# Altium PCB IP2366_DEMO_V1.41.pcbdoc
Units mil, origin at the board's own origin, x right, y up, seen from the top; angles counter-clockwise.
Board outline 4240 x 2935 mil, 2 copper layers (Top Layer, Bottom Layer); 72 components, 54 nets, 245 pads, 677 vias.
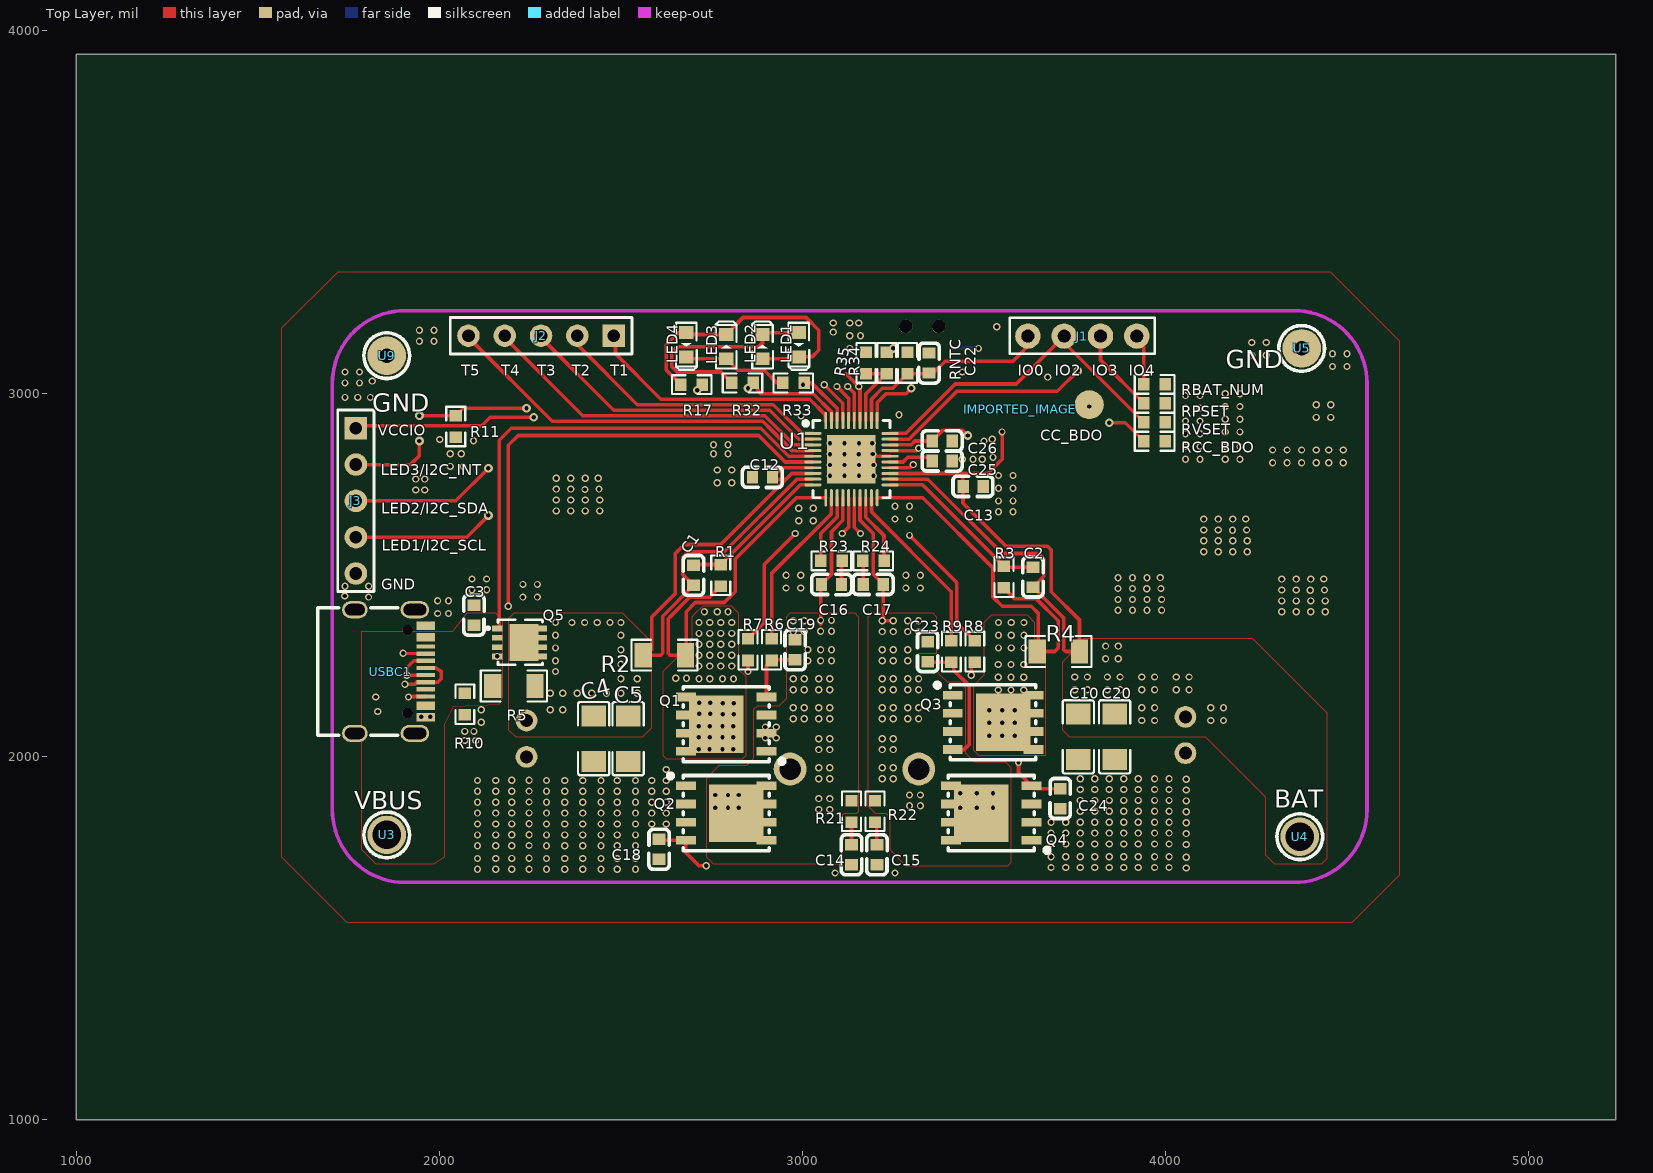
[diagram p0: Top Layer view]
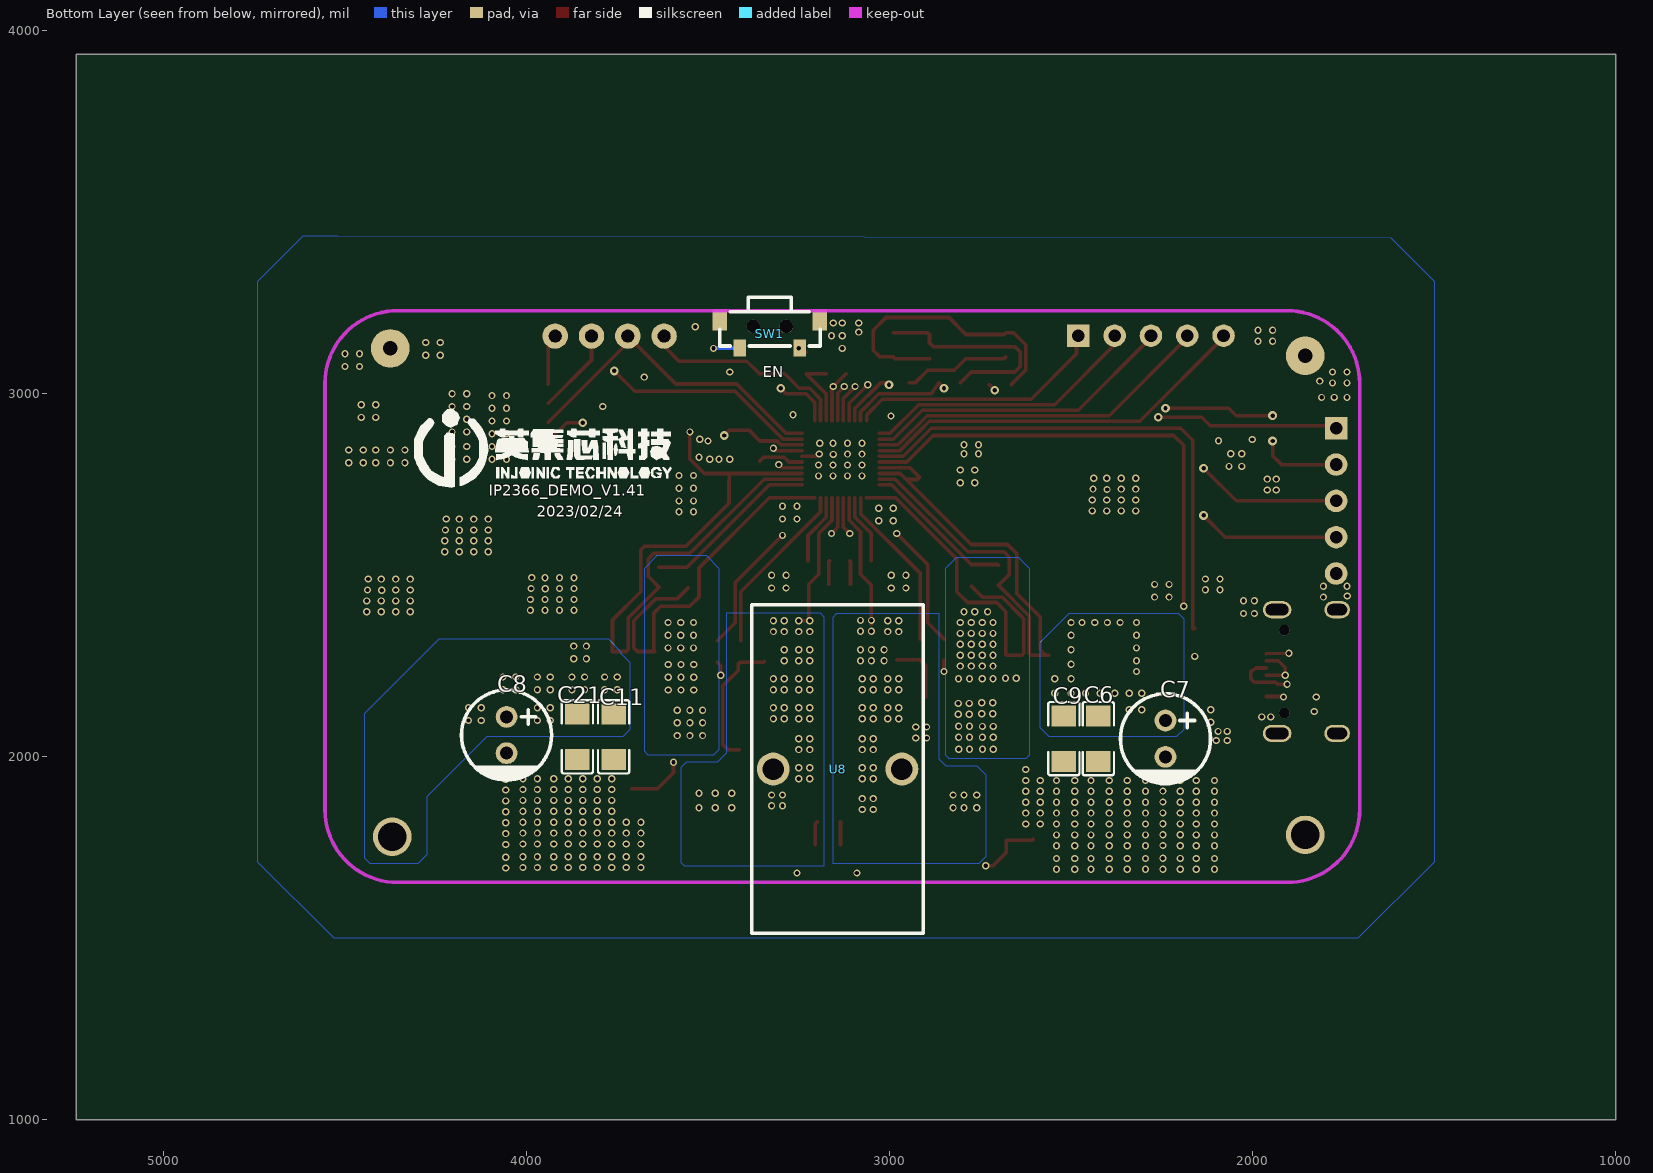
[diagram p1: Bottom Layer view, seen from below]

## Layer stack, top to bottom
Top Layer: signal copper (thickness not stored)
Dielectric: dielectric 12.6, FR-4, Dk 4.8
Bottom Layer: signal copper (thickness not stored)

## Board outline
5240,1000 1000,1000 1000,3935 5240,3935

## Components (designator, comment, footprint, x,y, rotation, side; value= is the part's Value field where it differs from the comment)
C1 "470nF" C0603 2700,2500 r90 top
C2 "1uF" C0603 3635,2495 r270 top
C3 "0.1u" C0603 2095,2390 r270 top
C4 "22uF/35V" C1206#1 2425,2050 r270 top
C5 "22uF/35V" C1206#1 2520,2050 r270 top
C6 "NC" C1206#2 2425,2050 r90 bottom
C7 "220uF/35V" CAP-D6.3-F2.5 2240,2050 r90 bottom
C8 "220uF/35V" CAP-D6.3-F2.5 4055,2060 r90 bottom
C9 "NC" C1206#2 2520,2050 r90 bottom
C10 "22uF/35V" C1206#1 3760,2055 r270 top
C11 "22uF/35V" C1206#2 3760,2055 r90 bottom
C12 "2.2uF" C0603 2890,2770 r0 top
C13 "2.2uF" C0603 3470,2745 r0 top
C14 "3.3nF" C0603 3135,1730 r270 top
C15 "3.3nF" C0603 3205,1730 r270 top
C16 "0.1uF" C0603 3080,2475 r180 top
C17 "0.1uF" C0603 3195,2475 r0 top
C18 "NC" C0603 2605,1745 r270 top
C19 "NC" C0603 2980,2295 r90 top
C20 "22uF/35V" C1206#1 3860,2055 r270 top
C21 "NC" C1206#2 3860,2055 r90 bottom
C22 "0.1uF" C0603 3349,3084.81 r90 top
C23 "NC" C0603 3345,2290 r90 top
C24 "NC" C0603 3710,1885 r270 top
C25 "2.2uF" C0603 3385,2815 r0 top
C26 "2.2uF" C0603 3385,2870 r0 top
IMPORTED_IMAGE "IMPORTED_IMAGE" IMPORTED_IMAGE 3600.02,2957.27 r0 top
J1 "Header4" HEADER4 3770,3160 r0 top
J2 "HDR-M-2.54_1x5" HDR-M-2.54_1X5 2280,3160 r180 top
J3 "HDR-M-2.54_1x5" HDR-M-2.54_1X5 1770,2705 r270 top
LED1 "LED-0603_B" LED0603_BLUE 2990,3135 r270 top
LED2 "LED-0603_B" LED0603_BLUE 2890,3130 r90 top
LED3 "LED-0603_B" LED0603_BLUE 2790,3130 r90 top
LED4 "LED-0603_B" LED0603_BLUE 2680,3135 r270 top
Q1 "AER4061BE" DFN-8_L5.2-W5.6-P1.27-LS6.1-BL 2790,2090 r90 top
Q2 "AER4061BE" DFN-8_L5.2-W5.6-P1.27-LS6.1-BL 2790,1845 r270 top
Q3 "AER4061BE" DFN-8_L5.2-W5.6-P1.27-LS6.1-BL 3525,2095 r270 top
Q4 "AER4061BE" DFN-8_L5.2-W5.6-P1.27-LS6.1-BL 3520,1845 r90 top
Q5 "RU3030M2" PDFN3333-8_L3.1-W3.2-P0.65-LS3.4-BL 2220,2315 r270 top
R1 "51R" R0603 2775,2500 r90 top
R2 "0.005R" R1206 2620,2280 r0 top
R3 "10R" R0603 3555,2495 r90 top
R4 "0.005R" R1206 3705,2290 r0 top
R5 "0R" R1206 2205,2195 r0 top
R6 "2R" R0603 2915,2295 r90 top
R7 "10R" R0603 2850,2295 r90 top
R8 "2R" R0603 3475,2290 r90 top
R9 "2R" R0603 3410,2290 r90 top
R10 "10K" R0603 2070,2145 r270 top
R11 "NC" R0603 2045,2910 r270 top
R17 "100R" R0603 2695,3025 r0 top
R21 "2R" R0603 3135,1850 r90 top
R22 "2R" R0603 3200,1850 r90 top
R23 "0R" R0603 3079.8,2540 r0 top
R24 "0R" R0603 3195.2,2540 r0 top
R32 "100R" R0603 2835,3030 r180 top
R33 "100R" R0603 2975,3030 r180 top
R34 "43K" R0603 3232.28,3085 r90 top
R35 "10K" R0603 3175,3085 r90 top
RBAT_NUM "18K" R0603 3970,3026 r180 top
RCC_BDO "NC" R0603 3970,2869 r180 top
RNTC "10K@25℃" R0603 3289.56,3085 r270 top
RPSET "27K" R0603 3970,2973.67 r180 top
RVSET "27K" R0603 3970,2921.33 r180 top
SW1 "1TS002G-1900-3500-CT" KEY-SMD_1TS002G 3330,3165 r180 bottom
U1 "IP2366" QFN-40_L5.0-W5.0-P0.40-TL-EP3.4 3135,2820 r0 top
U3 "GND" TESTPOINT-TH_BD3.2#1 1855,1785 r0 top
U4 "BAT" TESTPOINT-TH_BD3.2#1 4370,1780 r180 top
U5 "GND" TESTPOINT-TH_BD3.2#2 4375,3125 r0 top
U8 "22uH" IND-TH_L23.0-W12.0-P9.00-D1.3 3143.2,1966.39 r270 bottom
U9 "GND" TESTPOINT-TH_BD3.2#2 1855,3105 r0 top
USBC1 "TYPE-C-31-M-12" USB-C_SMD-TYPE-C-31-M-12 1865,2235 r270 top

## Footprints (in the part's own frame and the unit in brackets; to place one, negate y for a bottom-side part, rotate by r counter-clockwise, add the part's x,y. Pads: shape width x height; smd on the part's side, far side on the other; paste and mask are expansions set on the pad)
C0603 [mm]
  rect 0.8x0.9 smd: 1(-0.7,0) 2(0.7,0)
  silkscreen extent -1.41,-0.71 1.39,0.72
C1206#1 [mm]
  rect 1.485x1.728 smd: 1(-1.593,0) 2(1.593,0)
  silkscreen extent -2.56,-1.09 2.56,1.09
C1206#2 [mm]
  rect 1.485x1.728 smd: 1(1.593,0) 2(-1.593,0)
  silkscreen extent -2.56,-1.09 2.56,1.09
CAP-D6.3-F2.5 [mil]
  round 60 hole 36: 1(50,0) 2(-50,0)
  silkscreen extent -125,-124 124,124
DFN-8_L5.2-W5.6-P1.27-LS6.1-BL [mil]
  rect 24x55 smd: 1(-75,-111) 2(-25,-111) 3(25,-111) 4(75,-111) 5(75,111) 6(25,111) 7(-25,111) 8(-75,111)
  rect 157.99x150 smd: 9(0,28)
  silkscreen extent -107,-158 104,118
HDR-M-2.54_1X5 [mil]
  rect 62x62 hole 35: 1(-200,0)
  round 62 hole 35: 2(-100,0) 3(0,0) 4(100,0) 5(200,0)
  silkscreen extent -250,-50 250,50
HEADER4 [mil]
  round 70 hole 35 slot 35.2 at 0 deg: 1(-149,-1) 2(-49,-1) 3(51,-1) 4(151,-1)
  silkscreen extent -199,-50 201,50
IMPORTED_IMAGE [mil]
IND-TH_L23.0-W12.0-P9.00-D1.3 [mm]
  round 2.3 hole 1.5: 1(0,4.5) 2(0,-4.5)
  silkscreen extent -11.5,-6 11.5,6
KEY-SMD_1TS002G [mm]
  rect 0.9x1.2 smd: 1(2.1,-0.975) 2(-2.1,-0.975)
  rect 1x1.45 smd: 3(-3.5,0.975) 4(3.5,0.975)
  round 0.95 hole 0.95 unplated: ""(-1.15,0.525) ""(1.15,0.525)
  silkscreen extent -3.5,-0.85 3.52,2.56
LED0603_BLUE [mm]
  rect 0.9x1 smd: 1(-0.85,0) 2(0.85,0)
  silkscreen extent -1.54,-0.73 1.75,0.73
PDFN3333-8_L3.1-W3.2-P0.65-LS3.4-BL [mm]
  rect 0.4x0.75 smd: 1(-0.975,-1.533) 2(-0.325,-1.533) 3(0.325,-1.533) 4(0.975,-1.533)
  rect 0.4x0.8 smd: 5(0.975,1.533) 6(0.325,1.533) 7(-0.325,1.533) 8(-0.975,1.533)
  rect 2.6x2 smd: 9(-0.005,0.333)
  silkscreen extent -1.59,-2.29 1.56,1.61
QFN-40_L5.0-W5.0-P0.40-TL-EP3.4 [mm]
  oval 1.2x0.2 smd: 1(-2.699,1.8) 2(-2.699,1.4) 3(-2.699,1) 4(-2.699,0.6) 5(-2.699,0.2) 6(-2.699,-0.2) 7(-2.699,-0.6) 8(-2.699,-1) 9(-2.699,-1.4) 10(-2.699,-1.8) 21(2.699,-1.8) 22(2.699,-1.4) 23(2.699,-1) 24(2.699,-0.6) 25(2.699,-0.2) 26(2.699,0.2) 27(2.699,0.6) 28(2.699,1) 29(2.699,1.4) 30(2.699,1.8)
  oval 0.2x1.2 smd: 11(-1.8,-2.699) 12(-1.4,-2.699) 13(-1,-2.699) 14(-0.6,-2.699) 15(-0.2,-2.699) 16(0.2,-2.699) 17(0.6,-2.699) 18(1,-2.699) 19(1.4,-2.699) 20(1.8,-2.699) 31(1.8,2.699) 32(1.4,2.699) 33(1,2.699) 34(0.6,2.699) 35(0.2,2.699) 36(-0.2,2.699) 37(-0.6,2.699) 38(-1,2.699) 39(-1.4,2.699) 40(-1.8,2.699)
  rect 3.4x3.4 smd: 41(0,0)
  silkscreen extent -3.35,-2.7 2.7,2.7
R0603 [mil]
  rect 31.75x34.02 smd: 1(-29.66,0) 2(29.66,0)
  silkscreen extent -55,-26 55,26
R1206 [mil]
  rect 47.54x66.97 smd: 1(-58.22,0) 2(58.22,0)
  silkscreen extent -91,-42 91,42
TESTPOINT-TH_BD3.2#1 [mm]
  round 2.7 hole 2: 1(0,0)
  silkscreen extent -1.6,-1.6 1.6,1.6
TESTPOINT-TH_BD3.2#2 [mm]
  round 2.7 hole 1.016: 1(0,0)
  silkscreen extent -1.6,-1.6 1.6,1.6
USB-C_SMD-TYPE-C-31-M-12 [mm]
  oval 1.2x2 hole 0.8 slot 1.6 at 90 deg: 0(-4.325,1.716) 1(4.325,1.716)
  oval 1.2x1.8 hole 0.8 slot 1.4 at 90 deg: 2(4.325,-2.484) 3(-4.325,-2.484)
  rect 0.3x1.3 smd: A1(-3.35,2.484) A4(-2.55,2.484) A5(-1.25,2.484) A6(-0.25,2.484) A7(0.25,2.484) A8(1.25,2.484) A9(2.55,2.484) A12(3.35,2.484) B1(3.05,2.484) B4(2.25,2.484) B5(1.75,2.484) B6(0.75,2.484) B7(-0.75,2.484) B8(-1.75,2.484) B9(-2.25,2.484) B12(-3.05,2.484)
  round 0.75 hole 0.75 unplated: ""(-2.9,1.216) ""(2.9,1.216)
  silkscreen extent -4.47,-5.08 4.47,0.5

## Free pads (board coordinates)
  round 80 smd: 2(3790,2970)

## Via types
v1: diameter 20, hole 12, Top Layer to Bottom Layer, tented both sides, 663 vias
v2: diameter 24, hole 12, Top Layer to Bottom Layer, tented both sides, 14 vias

## Nets (pads, with @x,y where several pads share a name; then routed paths per layer and width w, separated by ;. In a path a pad name is that pad's centre, name@x,y a point inside that pad or via, vN(x,y) a via of type N, cw(c..) or ccw(c..) an arc to the next point about the centre after c; other vN are vias at no path point)
BAT: C2.2 C8.1 C10.1 C11.1 C13.1 C20.1 C21.1 R4.2 SW1.2 U1.22 U1.23 U4.1 | length 2301.7
  Top Layer w10: U1.22 3345.12,2764.88 3550,2560 3650,2560 3665,2545 3665,2497.44 C2.2 ; U1.23 3510.63,2780.63 3545,2815 ; 3441.9,2780.6 C13.1 ; C13.1 3442.44,2698.5 3560.94,2580 3675,2580 3685,2570 3685,2455 3763.22,2376.78 R4.2 3725,2290 3720,2295 3720,2382.4 C2.2 ; 3528.2,2798.2 3550,2820 v1(3550,2895)
  Mid-Layer 1 w10: v1(3485,3125) 3550,3060 v1(3550,2895)
  Bottom Layer w10: SW1.2 3414.28,3125 v1(3485,3125)
  other v1: 3935,2100 3970,2100 4125,2100 4160,2100 3935,2135 3970,2135 4125,2135 4160,2135 3750,2185 3785,2185 3840,2185 3875,2185 3935,2185 3970,2185 4030,2185 4065,2185 3750,2220 3785,2220 3840,2220 3875,2220 3935,2220 3970,2220 4030,2220 4065,2220 3835,2270 3870,2270 3835,2305 3870,2305
BAT_NUM: J1.4 RBAT_NUM.2 U1.27 | length 951.4
  Top Layer w10: U1.27 3313.6,2843.6 v1(3320,2850) ; J1.4 3940.34,3139.66 RBAT_NUM.2
  Mid-Layer 1 w10: v1(3320,2850) 3612,2850 J1.4
CC1: U1.37 USBC1.A5 | length 2079.8
  Top Layer w10: v1(1900,2285) USBC1.A5 ; v1(3060,3025) 3111.4,2973.6 U1.37
  Mid-Layer 1 w10: v1(1900,2285) 1880,2305 1880,2915 2030,3065 3020,3065 v1(3060,3025)
CC2: U1.34 USBC1.B5 | length 2462.6
  Top Layer w10: v1(1915,2165) 1916.1,2166.1 USBC1.B5 ; 3120,3055.3 3155,3020.3 v1(3155,3020) 3158.62,3016.38 U1.34
  Mid-Layer 1 w10: v1(1915,2165) 1885,2165 1835,2215 1835,2960 1990,3115 3060,3115 v1(3155,3020)
CC_BDO: pad.2 RCC_BDO.2 U1.24 | length 931.3
  Top Layer w10: U1.24@3241.3,2796 3296,2796 v1(3305,2805) ; v2(3845,2920) 3889.34,2920 RCC_BDO.2
  Mid-Layer 1 w10: v1(3305,2805) 3305,2800 3820,2800 3845,2825 3845,2960 3840,2965 v1(3790,2965)
DM: U1.36 USBC1.A7 USBC1.B7 | length 2293.1
  Top Layer w10: USBC1.A7 v1(1910,2225) 1910,2245 1929.53,2264.53 USBC1.B7 ; v1(3095,3020) 3127.13,2987.87 U1.36
  Mid-Layer 1 w10: v1(1910,2225) 1895,2225 1865,2255 1865,2935 2010,3080 3035,3080 v1(3095,3020)
DP: U1.35 USBC1.A6 USBC1.B6 | length 2430.8
  Top Layer w10: v1(1905,2200) 1931.5,2200 1937,2205.5 USBC1.B6 1995.5,2205.5 2005,2215 2005,2235 1990.2,2244.8 USBC1.A6 ; v1(3125,3020) 3142.9,3002.1 U1.35
  Mid-Layer 1 w10: v1(1905,2200) 1875,2200 1850,2225 1850,2950 1995,3095 3055,3095 3065,3080 v1(3125,3020)
EN: R34.1 R35.1 U1.33 | length 206.9
  Top Layer w10: U1.33 3174.4,2999.4 R34.1@3230,3055.3 ; R35.1 R34.1@3230,3055.34
GND: C3.1 C4.2 C5.2 C6.2 C7.2 C8.2 C9.2 C10.2 C11.2 C12.1 C13.2 C14.2 C15.2 C18.2 C20.2 C21.2 C22.2 C24.2 C25.2 C26.2 J3.5 Q2.1 Q2.2 Q2.3 Q4.1 Q4.2 Q4.3 R10.2 R11.2 R35.2 RBAT_NUM.1 RCC_BDO.1 RNTC.1 RPSET.1 RVSET.1 U1.26 U1.41 U5.1 U9.1 USBC1.0 USBC1.1 USBC1.2 USBC1.3 USBC1.A1 USBC1.A12 USBC1.B1 USBC1.B12 | length 49.8
  Top Layer w10: v1(3194,2834) 3200.13,2827.87 U1.26
  other v1: 3090,1680 3255,1680 2105,1690 2155,1690 2199.51,1690.22 2295,1690 2345,1690 2395,1690 2445,1690 2490,1690 2540,1690 2247.08,1690.59 4056.88,1693.62 3685,1695 3725,1695 3765,1695 3805,1695 3845,1695 3885,1695 3925,1695 3970,1695 4010,1695 2105,1720 2155,1720 2199.51,1720.22 2295,1720 2345,1720 2395,1720 2445,1720 2490,1720 2540,1720 2247.08,1720.59 4056.88,1723.62 3685,1725 3725,1725 3765,1725 3805,1725 3845,1725 3885,1725 3925,1725 3970,1725 4010,1725 2105,1755 2155,1755 2199.51,1755.22 2295,1755 2345,1755 2395,1755 2445,1755 2490,1755 2540,1755 2247.08,1755.59 4056.88,1758.62 3685,1760 3725,1760 3765,1760 3805,1760 3845,1760 3885,1760 3925,1760 3970,1760 4010,1760 2105,1785 2155,1785 2199.51,1785.22 2295,1785 2345,1785 2395,1785 2445,1785 2490,1785 2540,1785 2247.08,1785.59 4056.88,1788.62 3685,1790 3725,1790 3765,1790 3805,1790 3845,1790 3885,1790 3925,1790 3970,1790 4010,1790 2105,1815 2155,1815 2199.51,1815.22 2295,1815 2345,1815 2395,1815 2445,1815 2490,1815 2540,1815 2585,1815 2625,1815 2247.08,1815.59 4056.88,1818.62 3685,1820 3725,1820 3765,1820 3805,1820 3845,1820 3885,1820 3925,1820 3970,1820 4010,1820 2105,1845 2155,1845 2199.51,1845.22 2295,1845 2345,1845 2395,1845 2445,1845 2490,1845 2540,1845 2585,1845 2625,1845 2247.08,1845.59 4056.88,1848.62 3765,1850 3805,1850 3845,1850 3885,1850 3925,1850 3970,1850 4010,1850 2105,1875 2155,1875 2199.51,1875.22 2295,1875 2345,1875 2395,1875 2445,1875 2490,1875 2540,1875 2585,1875 2625,1875 2247.08,1875.59 4056.88,1878.62 3765,1880 3805,1880 3845,1880 3885,1880 3925,1880 3970,1880 4010,1880 2105,1905 2155,1905 2199.51,1905.22 2295,1905 2345,1905 2395,1905 2445,1905 2490,1905 2540,1905 2585,1905 2625,1905 2247.08,1905.59 4056.88,1908.62 3765,1910 3805,1910 3845,1910 3885,1910 3925,1910 3970,1910 4010,1910 2105,1935 2155,1935 2199.51,1935.22 2295,1935 2345,1935 2395,1935 2445,1935 2490,1935 2540,1935 2585,1935 2625,1935 2247.08,1935.59 4056.88,1938.62 3765,1940 3805,1940 3845,1940 3885,1940 3925,1940 3970,1940 4010,1940 2625,1965 2070,2045 2100,2045 2070,2070 2095,2070 2115,2095 1950,2110 1975,2110 1830,2125 2115,2130 1825,2165 1995,2395 2025,2395 4319.95,2399.54 4359.95,2399.54 4399.95,2399.54 4439.95,2399.54 3869.29,2403.54 3909.29,2403.54 3949.29,2403.54 3989.29,2403.54 1995,2430 2025,2430 4319.95,2429.54 4359.95,2429.54 4399.95,2429.54 4439.95,2429.54 3869.29,2433.54 3909.29,2433.54 3949.29,2433.54 3989.29,2433.54 1805,2440 2230,2440 2270,2440 1739,2443 4399.12,2458.66 2090,2460 2130,2460 4319.95,2459.54 4359.95,2459.54 4438.12,2459.66 3948.46,2462.66 3869.29,2463.54 3909.29,2463.54 3987.46,2463.66 2955,2465 2995,2465 3285,2465 3325,2465 1740,2470 1805,2470 2230,2475 2270,2475 2090,2490 2130,2490 4319.95,2489.54 4359.95,2489.54 4399.95,2489.54 4436.12,2489.66 3869.29,2493.54 3909.29,2493.54 3949.29,2493.54 3985.46,2493.66 2955,2500 2995,2500 3285,2500 3325,2500 4105.29,2564.87 4145.29,2564.87 4185.29,2564.87 4225.29,2564.87 4105.29,2594.87 4145.29,2594.87 4185.29,2594.87 4225.29,2594.87 4184.46,2623.99 4105.29,2624.87 4145.29,2624.87 4223.46,2624.99 2990,2650 3030,2650 3255,2655 3295,2655 4105.29,2654.87 4145.29,2654.87 4185.29,2654.87 4221.46,2654.99 3540,2675 3580,2675 2321.65,2677.43 2361.65,2677.43 2401.65,2677.43 2441.65,2677.43 2990,2685 3030,2685 3255,2690 3295,2690 3540,2705 3580,2705 2321.65,2707.43 2361.65,2707.43 2401.65,2707.43 2441.65,2707.43 1935,2735 1960,2735 2321.65,2737.43 2361.65,2737.43 2400.82,2736.55 2439.82,2737.55 3540,2740 3580,2740 2765,2755 2805,2755 1935,2765 1960,2765 2321.65,2767.43 2361.65,2767.43 2401.65,2767.43 2437.82,2767.55 3075.83,2773.88 3115.83,2773.88 3155.83,2773.88 3195.83,2773.88 3540,2775 3580,2775 2765,2790 2805,2790 2030,2800 2065,2800 3075.83,2803.88 3115.83,2803.88 3155.83,2803.88 3195.83,2803.88 4295,2810 4335,2810 4375,2810 4415,2810 4450,2810 4490,2810 3440,2820 3470,2820 3495,2820 4055,2820 4095,2820 4165,2820 4205,2820 3525,2825 3155,2833 3075.83,2833.88 3115.83,2833.88 2030,2835 2060,2835 2755,2835 2795,2835 4295,2845 4335,2845 4375,2845 4415,2845 4450,2845 4490,2845 4055,2855 4095,2855 4165,2855 4205,2855 2755,2860 2795,2860 3075.83,2863.88 3115.83,2863.88 3155.83,2863.88 3192,2864 3500,2870 2094,2871 2001,2874 3523,2875 4055,2890 4095,2890 4165,2895 4205,2895 4055,2925 4095,2925 4165,2930 4205,2930 4415,2935 4455,2935 2996.22,2938.96 3266.13,2942.58 4055,2960 4095,2960 4165,2965 4205,2965 4415,2970 4455,2970 1740,2990 1775,2990 1810,2990 4055,2995 4095,2995 4165,3000 4205,3000 1740,3030 1780,3030 1815,3035 3676,3046 1740,3060 1780,3060 3440,3060 4460,3075 4500,3075 4237.8,3106.15 4277.8,3106.15 4460,3110 4500,3110 3130,3125 4237.8,3141.15 4277.8,3141.15 1945,3145 1985,3145 3130,3160 3160,3160 3085,3170 1945,3175 1985,3175 3535,3185 3085,3195 3130,3195 3155,3195
HG1: R6.2 U1.12 | length 457.4
  Top Layer w10: R6.2 2915,2505 3079.88,2669.88 U1.12
HG2: R9.2 U1.19 | length 485.2
  Top Layer w10: U1.19 3190.12,2674.88 3410,2455 R9.2
LED1/I2C_SCL: J3.4 R32.1 U1.39 | length 1694.9
  Top Layer w10: J3.4 2075,2605 v2(2135,2665) ; v2(2850,3015) 2850,3015.34 R32.1 2885,3000 3030,3000 3079.9,2950 U1.39
  Mid-Layer 1 w10: v2(2135,2665) 2160,2690 2160,2915 2280,3035 2830,3035 v2(2850,3015)
LED1_1: LED1.1 LED2.2 R32.2 | length 609.8
  Top Layer w10: R32.2 2775.3,3060 2655,3060 2640,3075 2640,3115 2655,3130 2880,3130 2890,3140 LED2.2 2895.01,3168.47 LED1.1
LED1_2: LED1.2 LED2.1 LED3.2 LED4.1 R17.1 | length 816.1
  Top Layer w10: R17.1 2625,3065.3 2625,3135 2658.5,3168.5 LED4.1 ; LED4.1 2685.01,3163.46 LED3.2 2836.54,3210 3010,3210 3045,3175 3045,3120 3026.54,3101.54 LED1.2 2984.99,3096.53 LED2.1
LED2/I2C_SDA: J3.3 R33.1 U1.38 | length 1609.4
  Top Layer w10: J3.3 2045,2705 v2(2135,2795) ; R33.1 3025,3030 3095.6,2959.4 U1.38
  Mid-Layer 1 w10: v2(2135,2795) 2135,2915 2270,3050 2980,3050 v2(3001.41,3025)
LED3/I2C_INT: J3.2 R11.1 R17.2 U1.31 | length 1879.4
  Top Layer w10: J3.2 1920.34,2805 1945,2829.66 v2(1945,2870) ; v2(1945,2940) 1945.34,2939.66 R11.1 2065.34,2960 v2(2240,2960) ; v2(2710,3010) R17.2 ; U1.31 3205.9,2975.9 3230,3000 3285,3000 v2(3300,3015)
  Mid-Layer 1 w10: v2(1945,2870) v2(1945,2940) ; v2(2240,2960) 2295,3015 2710,3015 v2(2710,3010) ; v2@2715,3005 2730,2990 3180,2990 3205,3015 v2(3300,3015)
LG1: R7.2 U1.15 | length 580
  Top Layer w10: R7.2 2895,2369.7 2895,2530 v1(2980,2615) ; v1(3110,2615) 3127.13,2632.13 U1.15
  Mid-Layer 1 w10: v1(2980,2615) v1(3110,2615)
LG2: R8.2 U1.16 | length 607.8
  Top Layer w10: U1.16 3142.87,2632.13 v1(3160,2615) ; v1(3295,2610) 3425,2480 3425,2369.7 R8.2
  Mid-Layer 1 w10: v1(3160,2615) 3165,2610 v1(3295,2610)
LX1: C16.2 C19.2 Q1.1 Q1.2 Q1.3 Q2.5 Q2.6 Q2.7 Q2.8 Q2.9 R21.2 U1.14 U8.1 | length 374.1
  Top Layer w10: 3050,2365 v1(3050,2375.83) 3050,2472.56 C16.2 ; C16.2 3080,2502.6 3080,2620 3111.4,2651.4 U1.14
  other v1: 3045,1855 3075,1855 2760,1860 2795,1860 2825,1860 3045,1885 3075,1885 2760,1895 2795,1895 2825,1895 3045,1940 3075,1940 3045,1970 3075,1970 3045,2020 3075,2020 3045,2050 3075,2050 2898,2052 2928,2052 2898,2082 2928,2082 2975,2105 3005,2105 3045,2105 3075,2105 2975,2135 3005,2135 3045,2135 3075,2135 2975,2185 3005,2185 3045,2185 3075,2185 2975,2215 3005,2215 3045,2215 3075,2215 3015,2265 3050,2265 3080,2265 3015,2295 3050,2295 3080,2295 2975,2345 3005,2345 3050,2345.83 3080,2345.83 2975,2375 3005,2375 3080,2375.83
LX2: C17.2 C23.2 Q3.1 Q3.2 Q3.3 Q4.5 Q4.6 Q4.7 Q4.8 Q4.9 R22.2 U1.17 U8.2 | length 392.6
  Top Layer w10: U1.17 3158.6,2651.4 3195,2615 3195,2502.6 C17.2 3222.6,2375 v1(3250,2375)
  other v1: 3435,1860 3480,1860 3525,1860 3295,1865 3325,1865 3295,1895 3325,1895 3435,1900 3480,1900 3525,1900 3220,1940 3250,1940 3220,1970 3250,1970 3220,2020 3250,2020 3220,2050 3250,2050 3220,2105 3250,2105 3290,2105 3320,2105 3220,2135 3250,2135 3290,2135 3320,2135 3220,2185 3250,2185 3290,2185 3320,2185 3220,2215 3250,2215 3290,2215 3320,2215 3220,2265 3250,2265 3290,2265 3220,2295 3250,2295 3290,2295 3220,2345 3250,2345 3290,2345 3320,2345 3220,2375 3290,2375 3320,2375
NTC: C22.1 J1.1 RNTC.2 U1.32 | length 638.2
  Top Layer w10: U1.32 3190.1,2985.1 3220,3015 3248.7,3015 3289,3055.3 3358.3,3055.3 3393,3090 3580,3090 3621,3131 J1.1 ; RNTC.2@3289,3055.34 3348.9,3055.34 C22.1@3349,3055.44
PSET: J1.3 RPSET.2 U1.29 | length 951.4
  Top Layer w10: U1.29 3293.8,2875.1 3425.7,3007 3702,3007 v2(3758,3063) ; J1.3 3821,3093.01 RPSET.2
  Mid-Layer 1 w10: v2(3758,3063) 3821,3126 J1.3
Q1_4: C19.1 Q1.4 R6.1 | length 172
  Top Layer w10: Q1.4 2901,2251.34 R6.1 2917.1,2267.44 C19.1
Q1_5: Q1.5 Q1.6 Q1.7 Q1.8 Q1.9 R1.1 R2.2 U1.11 | length 1015.2
  Top Layer w10: R1.1 2744.7,2440 2690,2440 2635,2385 2630,2380 2630,2375 2630,2285 2635,2280 R2.2 2680,2281.8 2680,2400 2705,2425 2785,2425 2815,2455 2815,2545 2983.7,2713.7 U1.11
  other v1: 2714.07,2020.74 2744.07,2020.74 2779.63,2020.93 2809.63,2020.93 2714.26,2053.89 2744.26,2053.89 2779.82,2054.07 2809.82,2054.07 2714.26,2083.89 2744.26,2083.89 2779.82,2084.07 2809.82,2084.07 2780.56,2117.22 2810.56,2117.22 2716.11,2118.89 2746.11,2118.89 2780.56,2147.22 2810.56,2147.22 2716.11,2148.89 2746.11,2148.89 2715,2215 2745,2215 2780,2215 2810,2215 2650.74,2216.15 2680.74,2216.15 2715,2250 2745,2250 2775,2250 2805,2250 2715,2280 2745,2280 2775,2280 2805,2280 2715,2310 2745,2310 2775,2310 2805,2310 2715,2340 2745,2340 2775,2340 2805,2340 2715,2370 2745,2370 2775,2370 2805,2370 2730,2400 2765,2400 2795,2400
Q2_4: C18.1 Q2.4 R7.1 | length 792.9
  Top Layer w10: C18.1 2607.56,1770 Q2.4 2679,1736 2715,1700 v1(2735,1700) ; v1(2850,2235) R7.1
  Mid-Layer 1 w10: v1(2735,1700) 2850,1815 v1(2850,2235)
Q3_4: C23.1 Q3.4 R9.1 | length 365.2
  Top Layer w10: C23.1 3347.1,2260.34 R9.1 ; R9.1 3416.9,2256.2 3416.9,2238.1 3460,2195 3460,2035 3445,2020 Q3.4
Q4_4: C24.1 Q4.4 R8.1 | length 635.8
  Top Layer w10: v1(3465,2225) 3465,2250.34 R8.1 ; v1(3595,1985) 3595,1956 Q4.4 3638.44,1912.56 C24.1
  Mid-Layer 1 w10: v1(3465,2225) 3465,2173 3481.6,2156.4 3619.1,2156.4 3637.4,2138.1 3637.4,1985 v1(3595,1985)
R21_1: C14.1 R21.1 | length 62.8
  Top Layer w10: C14.1 R21.1
R22_1: C15.1 R22.1 | length 64.9
  Top Layer w10: R22.1 3205,1815.34 C15.1
R23_2: C16.1 R23.2 | length 65.8
  Top Layer w10: C16.1 3107.56,2538.1 R23.2
R24_1: C17.1 R24.1 | length 65.8
  Top Layer w10: R24.1 3167.44,2538.1 C17.1
R33_2: LED3.1 LED4.2 R33.2 | length 295
  Top Layer w10: LED4.2 2685.01,3096.53 LED3.1 2821.53,3065 2895,3065 2930,3030 R33.2
R34_2: R34.2 SW1.1 | length 24.3
  Top Layer w10: R34.2@3230,3114.66 3240.34,3125 v2(3250,3125)
SW1_3: SW1.3
SW1_4: SW1.4
TEST1: J2.1 U1.40 | length 703.4
  Top Layer w10: J2.1@2485,3150 2485,3110 2610,2985 3020,2985 3063.3,2941.6 U1.40@3063.3,2926.3
TEST2: J2.2 U1.1 | length 762.7
  Top Layer w10: J2.2@2385,3150 2385,3130 2545,2970 2920,2970 2999.1,2890.9 U1.1
TEST3: J2.3 U1.2 | length 869.6
  Top Layer w10: J2.3 2280,3155 2480,2955 2885,2955 2895,2955 2910,2955 2989.9,2875.1 U1.2
TEST4: J2.4 U1.3 | length 964.1
  Top Layer w10: J2.4@2185,3150 2395,2939.9 2896.4,2939.9 2976.9,2859.4 U1.3
TEST5: J2.5 U1.4 | length 1082.7
  Top Layer w10: J2.5 2080,3155 2311,2924 2891,2924 2915,2900 2930,2885 2971.4,2843.6 U1.4
U1_10: C1.2 R1.2 U1.10 | length 420.5
  Top Layer w10: C1.2 2702.1,2529.66 R1.2 2994.47,2749.13 U1.10
U1_13: R23.1 U1.13 | length 192.6
  Top Layer w10: R23.1 3050.15,2615.15 3095.63,2660.63 U1.13
U1_18: R24.2 U1.18 | length 194.6
  Top Layer w10: U1.18 3174.37,2660 3224.85,2609.52 R24.2@3224.85,2540
U1_20: Q3.5 Q3.6 Q3.7 Q3.8 Q3.9 R3.1 R4.1 U1.20 | length 1054
  Top Layer w10: U1.20 3331.3,2713.7 3525,2520 3525,2440 3550,2415 3630,2415 3650,2395 3650,2293.2 R4.1 3695,2290 3705,2300 3705,2375 3645,2435 3585.3,2435 R3.1
  other v1: 3515,2058.57 3550,2058.57 3585,2058.57 3515,2093.57 3550,2093.57 3585,2093.57 3515,2128.57 3550,2128.57 3585,2128.57 3539.63,2184.26 3574.63,2184.26 3609.63,2184.26 3539.63,2219.26 3574.63,2219.26 3609.63,2219.26 3539.63,2254.26 3574.63,2254.26 3609.63,2254.26 3540,2300 3575,2300 3610,2300 3540,2335 3575,2335 3610,2335 3540,2370 3575,2370 3610,2370
U1_21: C2.1 R3.2 U1.21 | length 487.6
  Top Layer w10: U1.21 3330.53,2749.13 R3.2 3557.1,2522.56 C2.1
USBC1_A8: USBC1.A8
USBC1_B8: USBC1.B8
VBUS: C3.2 Q5.1 Q5.2 Q5.3 R5.1 R10.1 U1.5 U3.1 USBC1.A4 USBC1.A9 USBC1.B4 USBC1.B9 | length 1433.3
  Top Layer w10: Q5.1 2165,2353.4 2165,2872 2198,2905 2885,2905 2962.1,2827.9 U1.5
VBUSG: Q5.4 U1.6 | length 1469
  Top Layer w10: v1@2190,2420 2190,2858 2217,2885 2880,2885 2952.9,2812.1 U1.6
  Mid-Layer 1 w10: v1(2159.63,2276.61) 2190,2306.98 v1(2190,2415)
  other v1: 2159.63,2276.61
VCC5V: C25.1 U1.25 | length 125.7
  Top Layer w10: U1.25 3277.1,2812.1 3290,2825.1 3347.3,2825.1 C25.1
VCCIO: C26.1 J3.1 U1.28 | length 2148.3
  Top Layer w10: J3.1 1770,2912 2117,2912 2140,2935 v2(2260,2935) ; U1.28 3300,2860 3310,2870 C26.1 3387.44,2900 3440,2900 v2(3455,2885)
  Mid-Layer 1 w10: v2(2260,2935) 2300,2975 3510,2975 3520,2965 3520,2920 3485,2885 v2(3455,2885)
VING: 
VIO: C1.1 C4.1 C5.1 C6.1 C7.1 C9.1 C12.2 Q5.5 Q5.6 Q5.7 Q5.8 Q5.9 R2.1 R5.2 U1.7 U1.8 U1.9 | length 1768.1
  Top Layer w10: 2954.01,2764.01 2923.55,2764.01 C12.2 2943.94,2796.38 U1.7 ; U1.9 2984.9,2764.9 2785,2565 2685,2565 2670,2550 2670,2502.4 C1.1 2615,2387.4 2615,2285 2610,2280 R2.1 2570,2280 2585,2295 2585,2385 2650,2450 2650,2560 2675,2585 2775,2585 2970.6,2780.6 U1.8
  other v1: 2305,2130 2340,2130 2305,2175 2340,2175 2380,2175 2420,2175 2460,2175 2500,2175 2545,2175 2500,2215 2545,2215 2320,2235 2500,2255 2320,2265 2500,2295 2320,2300 2320,2335 2500,2335 2320,2370 2365,2370 2400,2370 2435,2370 2470,2370 2500,2370
VSET: J1.2 RVSET.2 U1.30 | length 919.3
  Top Layer w10: U1.30 3284.9,2890.9 3421,3027 3589,3027 J1.2 3721,3140.67 RVSET.2
pads on no net: SW1. USBC1.
copper on no net: | length 0

## Polygon pours and split planes (outlines as drawn)
LX1 on Bottom Layer (solid): 2865,2395 2865,2180 2865,2145 2865,2140 2865,2130 2865,2085 2865,1995 2845,1975 2760,1975 2735,1950 2735,1725 2755,1705 3090,1705 3105,1705 3155,1705 3155,1725 3155,1785 3155,1800 3155,1860 3155,1910 3155,2370 3155,2385 3145,2395 2965,2395
VIO on Bottom Layer (solid): 2205,2395 2190,2380 2190,2075 2210,2055 2560,2055 2585,2080 2585,2315 2505,2395 2485,2395
LX2 on Bottom Layer (solid): 3285,1700 3180,1700 3180,1735 3180,1780 3180,1810 3180,1835 3180,1865 3180,2385 3190,2395 3450,2395 3450,2235 3450,2205 3450,2200 3450,2190 3450,2010 3475,1985 3560,1985 3575,1970 3575,1710 3565,1700 3285,1700
BAT on Bottom Layer (solid): 3740,2285 3715,2260 3715,2075 3735,2055 4110,2055 4275,1890 4275,1730 4300,1705 4430,1705 4445,1720 4445,2120 4240,2325 3775,2325 3740,2290 3740,2285
Q1_5 on Bottom Layer (solid): 2645,2550 2615,2520 2615,2010 2615,2005 2625,1995 2835,1995 2845,2005 2845,2520 2815,2550 2810,2550
U1_20 on Bottom Layer (solid): 3505,2555 3470,2520 3470,2020 3485,2005 3665,2005 3675,2015 3675,2520 3640,2555 3580,2555
GND on Bottom Layer (solid): 1620,3430 1500,3310 1500,1710 1710,1500 4530,1500 4740,1710 4740,3310 4615,3435 4520,3435
GND on Mid-Layer 2 (solid): 1680,3380 1555,3255 1555,1760 1775,1540 4525,1540 4660,1675 4660,3285 4565,3380 4395,3380
GND on Mid-Layer 1 (solid): 1655,3415 1590,3350 1590,1700 1715,1575 4570,1575 4655,1660 4655,3245 4485,3415 4405,3415
LX2 on Top Layer (solid): 3180,2385 3180,1865 3200,1845 3230,1845 3240,1835 3240,1745 3285,1700 3565,1700 3575,1710 3575,1715 3575,1970 3560,1985 3475,1985 3450,2010 3450,2190 3435,2205 3400,2205 3380,2225 3375,2230 3370,2240 3320,2240 3320,2285 3370,2285 3370,2385 3360,2395 3355,2395 3190,2395
Q1_5 on Top Layer (solid): 2655,2275 2615,2235 2615,2005 2625,1995 2835,1995 2845,2005 2845,2220 2825,2240 2825,2395 2805,2415 2725,2415 2705,2395 2695,2385 2695,2320 2680,2305 2680,2290
VIO on Top Layer (solid): 2205,2395 2190,2380 2190,2075 2210,2055 2560,2055 2585,2080 2585,2315 2505,2395 2485,2395
U1_20 on Top Layer (solid): 3520,2390 3500,2370 3500,2225 3470,2195 3470,2020 3485,2005 3495,2005 3670,2005 3670,2295 3640,2325 3640,2370 3620,2390
BAT on Top Layer (solid): 3740,2285 3715,2260 3715,2075 3735,2055 4110,2055 4275,1890 4275,1730 4300,1705 4430,1705 4445,1720 4445,2120 4240,2325 3775,2325 3740,2290 3740,2285
GND on Top Layer (solid): 1720,3335 1565,3180 1565,1725 1745,1545 4515,1545 4645,1675 4645,3145 4455,3335 4160,3335
LX1 on Top Layer (solid): 2955,2385 2955,2160 2935,2140 2875,2140 2865,2130 2865,2085 2865,1995 2845,1975 2770,1975 2735,1940 2735,1725 2755,1705 3090,1705 3105,1705 3110,1710 3110,1840 3115,1845 3150,1845 3155,1850 3155,1860 3155,1910 3155,2370 3155,2385 3145,2395 2965,2395
VBUS on Top Layer (solid): 1850,2345 1785,2345 1785,1745 1825,1705 1905,1705 1985,1705 2015,1725 2015,2090 2040,2140 2165,2145 2175,2165 2175,2375 2155,2395 2075,2395 2035,2345

## Keep-outs
Keep-Out Layer:
  lines w10: 1705,1854.09 ccw(c1905,1854.09) 1905,1654.09 ; 1705,3028.89 cw(c1905,3028.89) 1905,3228.89 ; 4354.99,1654.09 ccw(c4354.99,1854.09) 4554.99,1854.09 ; 4354.99,3228.89 cw(c4354.99,3028.89) 4554.99,3028.89

## Silkscreen, mask and mechanical layers (free items; w line width, h text height)
Top Overlay:
  text "GND" at 4166,3071 h50
  text "T5" at 2060,3050 h30
  text "T4" at 2170,3050 h30
  text "T3" at 2270,3050 h30
  text "T2" at 2365,3050 h30
  text "T1" at 2470,3050 h30
  text "IO0" at 3593,3050 h30
  text "IO2" at 3695,3050 h30
  text "IO3" at 3797,3050 h30
  text "IO4" at 3899,3050 h30
  text "GND" at 1815,2950 h50
  text "VCCIO" at 1830,2885 h30
  text "CC_BDO" at 3655,2870 h30
  text "LED3/I2C_INT" at 1838,2775 h30
  text "LED2/I2C_SDA" at 1840,2669 h30
  text "LED1/I2C_SCL" at 1841,2568 h30
  text "GND" at 1840,2460 h30
  text "BAT" at 4300,1860 h50
  text "VBUS" at 1765,1855 h50
Bottom Overlay:
  text "EN" at 3350,3045 h30
  text "IP2366_DEMO_V1.41" at 4104,2708 h51.18
  text "2023/02/24" at 3972,2650 h51.18
Top Solder:
  region net GND: 2040,2030 2025,2010 2030,1720 2050,1705 2605,1705 2630,1730 2630,1785 2630,1920 2355,1920 2355,2030
  region net GND: 3720,1925 3675,1925 3675,1900 3675,1700 4225,1700 4235,1710 4235,1880 4085,2030 3930,2030 3930,1925
  region net Q1_5: 2970,2390 2960,2380 2960,2160 2960,1710 3095,1710 3100,1715 3100,1905 3115,1920 3140,1920 3150,1930 3150,2380 3140,2390 3130,2390
  region net LX2: 3195,2390 3185,2380 3185,1930 3195,1920 3225,1920 3245,1900 3245,1750 3285,1710 3365,1710 3365,1950 3365,1985 3365,2005 3365,2030 3365,2050 3365,2230 3365,2380 3355,2390 3350,2390
  region net Q1_5: 2805,2410 2820,2395 2820,2210 2715,2210 2715,2395 2730,2410
  region net U1_20: 3520,2385 3505,2370 3505,2210 3615,2210 3615,2370 3615,2385
  rectangle net GND: 3796,2348 4521,2792
  rectangle net GND: 2238,2497 2618,2833
Bottom Solder:
  region net Q2_4: 2870,2390 2870,1995 2850,1975 2845,1970 2840,1965 2770,1965 2740,1935 2740,1730 2760,1710 3150,1710 3150,2380 3140,2390
  region net LX2: 3195,2390 3185,2380 3185,1710 3560,1710 3570,1720 3570,1965 3565,1970 3560,1975 3555,1980 3470,1980 3445,2005 3440,2010 3440,2015 3440,2390
  region net VIO: 2645,2550 2615,2520 2615,2015 2625,2005 2830,2005 2835,2010 2835,2520 2805,2550
  region net Q4_4: 3490,2530 3480,2520 3480,2030 3495,2015 3665,2015 3675,2025 3675,2520 3645,2550 3510,2550
  region net Q2_4: 1975,2045 1940,2010 1940,1715 1970,1685 2700,1685 2720,1705 2720,1945 2695,1970 2620,1970 2595,1940 2370,1940 2370,2045
  region net Q4_4: 3615,1980 3600,1965 3600,1715 3620,1695 4225,1695 4245,1715 4245,1885 4100,2030 4085,2030 3915,2030 3915,1945 3700,1945 3700,1980 3690,1980 3680,1980
  region net VING: 3047.5,2997.5 2947.5,2897.5 2947.5,2877.5 2942.5,2872.5 2612.5,2872.5 2602.5,2862.5 2602.5,2647.5 2617.5,2632.5 3437.5,2632.5 3447.5,2642.5 3447.5,2742.5 3402.5,2787.5 3302.5,2787.5 3287.5,2802.5 3287.5,2932.5 3267.5,2952.5 3232.5,2952.5 3187.5,2997.5 3162.5,2997.5
  rectangle net GND: 2174,2534 2620,2895
  rectangle net GND: 3800,2355 4524,2608